# Altium PCB 7seg.PcbDoc
Units mil, origin at the board's own origin, x right, y up, seen from the top; angles counter-clockwise.
Board outline 2559.06 x 1160.43 mil, 2 copper layers (Top Layer, Bottom Layer); 19 components, 33 nets, 130 pads, 15 vias.
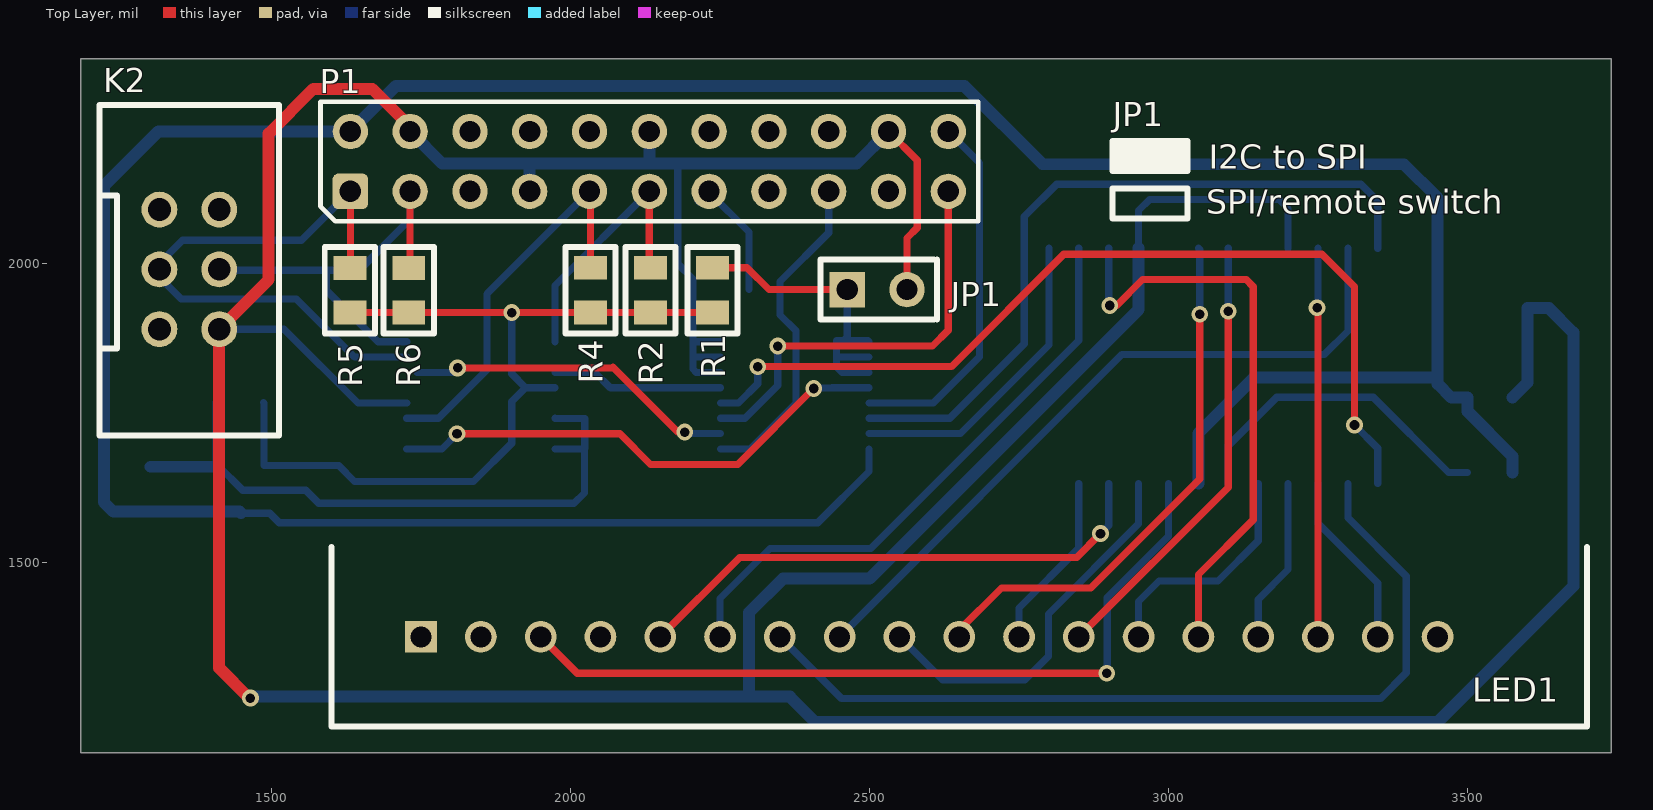
[diagram p0: Top Layer view]
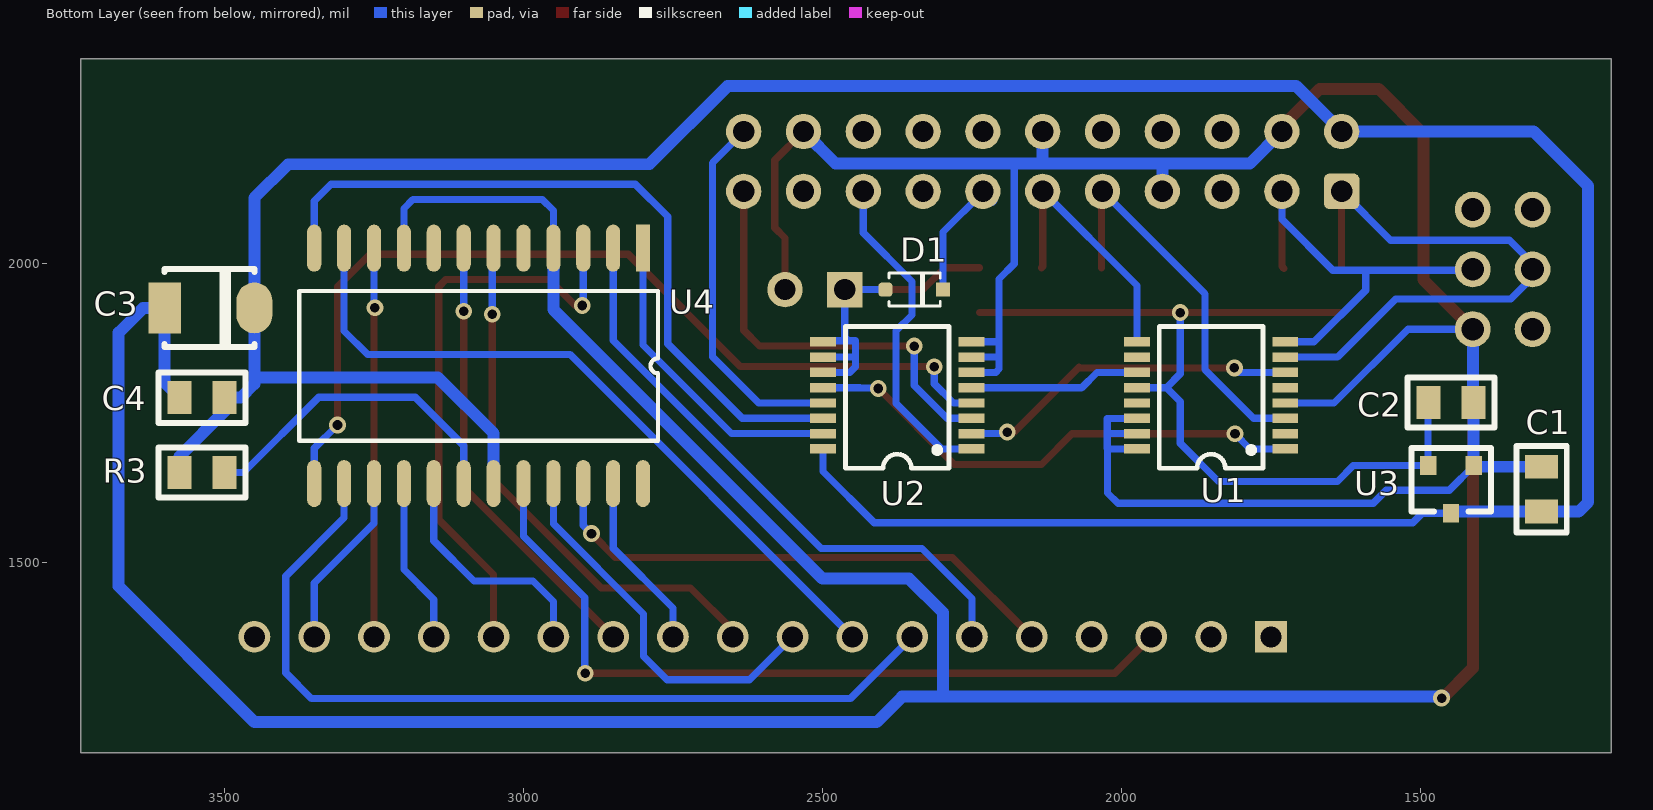
[diagram p1: Bottom Layer view, seen from below]

## Layer stack, top to bottom
Top Solder: solder mask 0.4, Solder Resist, Dk 3.5
Top Layer: signal copper 1.4
Dielectric 1: dielectric 12.6, FR-4, Dk 4.8
Bottom Layer: signal copper 1.4
Bottom Solder: solder mask 0.4, Solder Resist, Dk 3.5

## Board outline
1181.1,1181.1 3740.16,1181.1 3740.16,2341.54 1181.1,2341.54

## Design rules (kind name [scope] priority, off if disabled: settings)
Clearance [All] p1: gap=6
ComponentClearance [All] p1: gap=0 collisioncheckmode=3 verticalgap=0 showdistances=FALSE
HoleSize [All] p1: absolutevalues=TRUE maxlimit=130 minlimit=1 maxpercent=80.000 minpercent=20.000
MinimumSolderMaskSliver [All] p1: minsoldermaskwidth=1
PolygonConnect [All] p1: connectstyle=Relief reliefconductorwidth=10 reliefentries=4 polygonreliefangle="90 Angle" airgapwidth=10
RoutingVias [All] p1: holewidth=28 width=50 viastyle="Through Hole" minholewidth=28 minwidth=50 maxholewidth=28 maxwidth=50
SilkToSilkClearance [All] p1: silktosilkclearance=0
SilkToSolderMaskClearance [IsPad] p1: minsilkscreentomaskgap=0 clearancetoexposedcopper=TRUE
SolderMaskExpansion [All] p1: expansion=4
Width [All] p1: maxlimit=100 minlimit=10 preferedwidth=10
25 further rules are at their usual default settings.

## Components (designator, comment, footprint, x,y, rotation, side; value= is the part's Value field where it differs from the comment)
C1 "cap0805" SM0805 1297.24,1659.45 r270 bottom
C2 "cap0805" SM0805 1411.42,1766.73 r0 bottom
C3 "CAP_POL_SMB" "CAP_POL_SMB (3528)" 3460,1925 r0 bottom
C4 "cap0805" SM0805 3500,1775 r0 bottom
D1 "DiodeShottky_SOD323" SOD323 2389.76,1955.71 r180 bottom
JP1 "JUMPER2" JUMPER2 2462.6,1955.71 r90 top
K2 "IDC-06" IDC-06 1312.4,2089.57 r0 top
LED1 "NSA1166" NSA1166 1750,1375 r90 top
P1 "2x11,2.54mm vertical" "PLD-22 ,2x11 ,2.54 mm pitch" 2581.69,2170.08 r0 top (schematic designator P?)
R1 "res0805" SM0805 2237.2,1992.32 r270 top
R2 "res0805" SM0805 2133.86,1917.32 r90 top
R3 "res0805" SM0805 3575,1650 r180 bottom
R4 "res0805" SM0805 2033.46,1917.32 r90 top
R5 "res0805" SM0805 1630.91,1992.13 r270 top
R6 "res0805" SM0805 1729.33,1992.13 r270 top
U1 "SC18IS602BIPW" SSOP16_body_4.5mm 1850,1775 r90 bottom
U2 "74hc4053" SSOP16_body_4.5mm 2375,1775 r90 bottom
U3 "XC6206" SOT-23 1409.45,1661.42 r0 bottom
U4 "MAX7221" WSOIC_24_body_7.5mm 2800,2025 r270 bottom

## Footprints (in the part's own frame and the unit in brackets; to place one, negate y for a bottom-side part, rotate by r counter-clockwise, add the part's x,y. Pads: shape width x height; smd on the part's side, far side on the other; paste and mask are expansions set on the pad)
"CAP_POL_SMB (3528)" [mil]
  oval 60x85 smd: 1(-10,0)
  rect 55x85 smd: 2(140,0)
  silkscreen extent -10,-65 140,65
IDC-06 [mil]
  round 60 hole 38: 1(0,0) 2(100,0) 3(0,-100) 4(100,-100) 5(0,-200) 6(100,-200)
  silkscreen extent -100,-378 200,175
JUMPER2 [mm]
  rect 1.5x1.5 hole 0.9: 1(0,0)
  round 1.5 hole 0.9: 2(0,-2.54)
  silkscreen extent -1.27,-3.81 1.27,1.14
NSA1166 [mm] "7 seg LED"
  rect 1.35x1.35 hole 0.9: 1(0,0)
  round 1.35 hole 0.9: 2(0,-2.54) 3(0,-5.08) 4(0,-7.62) 5(0,-10.16) 6(0,-12.7) 7(0,-15.24) 7(0,-15.24) 8(0,-17.78) 9(0,-20.32) 10(0,-22.86) 11(0,-25.4) 12(0,-27.94) 13(0,-30.48) 14(0,-33.02) 15(0,-35.56) 16(0,-38.1) 17(0,-40.64) 18(0,-43.18)
  silkscreen extent -3.81,-49.53 3.81,3.81
"PLD-22 ,2x11 ,2.54 mm pitch" [mm]
  rrect30% 1.5x1.5 hole 0.9: 1(-24.13,-1.27)
  round 1.5 hole 0.9: 2(-24.13,1.27) 3(-21.59,-1.27) 4(-21.59,1.27) 5(-19.05,-1.27) 6(-19.05,1.27) 7(-16.51,-1.27) 8(-16.51,1.27) 9(-13.97,-1.27) 10(-13.97,1.27) 11(-11.43,-1.27) 12(-11.43,1.27) 13(-8.89,-1.27) 14(-8.89,1.27) 15(-6.35,-1.27) 16(-6.35,1.27) 17(-3.81,-1.27) 18(-3.81,1.27) 19(-1.27,-1.27) 20(-1.27,1.27) 21(1.27,-1.27) 22(1.27,1.27)
  silkscreen extent -25.4,-2.54 2.54,2.54, body extent -25.4,-2.54 2.54,2.54, height 8.54
SM0805 [mil]
  rect 40x55 smd: 1(0,0) 2(75,0)
  silkscreen extent -35,-42 110,42
SOD323 [mm] "SOD323"
  rrect50% 0.6x0.6 smd: 1(-0.125,0)
  rect 0.6x0.6 smd: 2(2.325,0)
  silkscreen extent 0.03,-0.7 2.2,0.7, body extent 0.25,-0.7 2.05,0.7, height 1.15
SOT-23 [mm]
  rect 0.7x0.8 smd: 1(0.025,0) 2(1.975,0) 3(1,2.025)
  silkscreen extent -0.7,-0.75 2.68,1.95
SSOP16_body_4.5mm [mm] "SSOP-16;Body Width 4.5mm; Pitch 0.65 mm"
  rect 0.4x1.1 smd: 1(-2.175,-3.15) 2(-1.525,-3.15) 3(-0.875,-3.15) 4(-0.225,-3.15) 5(0.425,-3.15) 6(1.075,-3.15) 7(1.725,-3.15) 8(2.375,-3.15) 9(2.375,3.15) 10(1.725,3.15) 11(1.075,3.15) 12(0.425,3.15) 13(-0.225,3.15) 14(-0.875,3.15) 15(-1.525,3.15) 16(-2.175,3.15)
  silkscreen extent -3,-2.2 3.02,2.2
WSOIC_24_body_7.5mm [mm]
  rect 2x0.6 smd: 1(0,0)
  oval 2x0.6 smd: 2(0,-1.27) 3(0,-2.54) 4(0,-3.81) 5(0,-5.08) 6(0,-6.35) 7(0,-7.62) 8(0,-8.89) 9(0,-10.16) 10(0,-11.43) 11(0,-12.7) 12(0,-13.97) 13(10,-13.97) 14(10,-12.7) 15(10,-11.43) 16(10,-10.16) 17(10,-8.89) 18(10,-7.62) 19(10,-6.35) 20(10,-5.08) 21(10,-3.81) 22(10,-2.54) 23(10,-1.27) 24(10,0)
  silkscreen extent 1.82,-14.61 8.19,0.63

## Part data
C1 C2 C4: "Capacitor"
C3: "CAP_POL_SMB(3528)"
D1: "SOD323"
LED1: "NSA retro 7 seg display"
P1: library part "2x11, 2.54mm, vertical", "Header, 22-Pin"
R1 R2 R3 R4 R5 R6: "Resistor"
U1: "i2c to SPI bridge"
U2: "3 independent SPDT CMOS switch"
U3: "SOT-23-3 ldo"
U4: library part MAX7221_WSOIC24, "7 seg 8 digits driver"

## Via types
v1: diameter 28, hole 16, Top Layer to Bottom Layer, 15 vias

## Nets (pads, with @x,y where several pads share a name; then routed paths per layer and width w, separated by ;. In a path a pad name is that pad's centre, name@x,y a point inside that pad or via, vN(x,y) a via of type N, cw(c..) or ccw(c..) an arc to the next point about the centre after c; other vN are vias at no path point)
+3.3V: C2.2 R1.2 R2.1 R4.1 R5.2 R6.2 U1.12 U3.2 | length 1447.9
  Top Layer w12: R5.2 1631.1,1917.32 R2.1 R1.2
  Bottom Layer w12: C2.2 1487.2,1765.94 U3.2 1612.2,1661.42 1638.78,1634.84 1837.6,1634.84 1901.57,1698.82 1901.57,1768.5 1924.8,1791.73 ; v1@1901.57,1914.37 1901.57,1814.96 1924.8,1791.73 ; U1.12 1924.8,1791.73
  other v1: 1901.57,1917.32
+5V: C1.2 C3.1 C4.1 P1.2 R3.1 U2.16 U3.3 U4.19 | length 5320
  Bottom Layer w12: U3.3 1497.05,1581.69 1512.8,1565.94 2413.39,1565.94 2499.02,1651.57 U2.16
  Bottom Layer w20: U3.3 1446.06,1584.45 C1.2 1235.43,1584.45 1219.49,1600.39 1219.49,2128.94 1310.63,2220.08 P1.2 1707.87,2296.26 2658.46,2296.26 2789.37,2165.35 3393.7,2165.35 3450,2109.06 C3.1 3450,1811.02 ; U4.19 3050,1715.35 3143.35,1808.71 3450,1808.71 3450,1798.03 3473.03,1775 C4.1 3500,1751.97 3575,1676.97 R3.1
CSE: P1.22 U2.13 | length 615.3
  Bottom Layer w12: U2.13 2606.69,1766.14 2684.06,1843.5 2684.06,2167.72 P1.22
CSI: U1.1 U2.12 | length 857.8
  Top Layer w12: v1(1810.04,1714.57) 2082.68,1714.57 2133.86,1663.39 2279.53,1663.39 v1(2406.5,1790.35)
  Bottom Layer w12: U1.1 1784.84,1689.37 v1(1810.04,1714.57) ; v1(2406.5,1790.35) 2407.48,1791.34 2437.01,1791.34 2437.4,1791.73 U2.12
CST: U2.14 U4.12 | length 1228
  Bottom Layer w12: U2.14 2634.25,1740.55 2758.86,1865.16 2758.86,2077.76 2812.99,2131.89 3321.85,2131.89 3350,2103.74 U4.12
GND: C1.1 C2.1 C3.2 C4.2 JP1.2 K2.6 P1.4 P1.7 P1.12 P1.20 U1.4 U1.14 U1.15 U1.16 U2.6 U2.7 U2.8 U3.1 U4.4 U4.9 | length 9192
  Top Layer w12: P1.20 2579.72,2172.05 2579.72,2059.06 2562.6,2041.93 JP1.2 JP1.2@2578.74,1971.85
  Top Layer w20: v1(1464.57,1272.64) 1462.6,1272.64 1412.4,1322.83 K2.6 1495.08,1972.24 1495.08,2216.54 1569.88,2291.34 1668.31,2291.34 1731.69,2227.95 P1.4
  Bottom Layer w12: U3.1 1451.77,1620.08 1557.09,1620.08 1578.74,1598.43 2005.91,1598.43 2023.23,1615.75 2023.23,1689.37 ; K2.6 1520.87,1889.57 1644.29,1766.14 U1.4 ; U1.16 2023.23,1689.37 ; U1.15 2023.62,1714.96 ; U1.14 1974.41,1740.16 2023.62,1740.16 2023.62,1714.96 ; 2179.13,2166.34 2179.13,1999.02 2204.72,1973.43 2204.72,1866.93 ; U2.6 2210.24,1817.32 2204.72,1822.83 2204.72,1844.88 ; U2.7 2206.69,1842.91 2204.72,1844.88 ; U2.8 2206.3,1868.5 2204.72,1866.93 ; U4.4 2950,2087.8 2968.5,2106.3 3185.04,2106.3 3200,2091.34 U4.9 ; 2023.23,1689.37 2023.62,1689.76 2023.62,1714.96 ; 2204.72,1844.88 2204.72,1866.93
  Bottom Layer w20: C1.1 1408.46,1659.45 U3.1 1411.42,1662.4 C2.1 1412.4,1767.72 K2.6 ; v1@1460.24,1275 2298.23,1275 ; P1.4 1785.43,2166.34 1936.02,2166.34 ; P1.7 1931.69,2162.01 1936.02,2166.34 ; P1.12 2131.69,2166.54 2131.89,2166.34 ; P1.20 2477.95,2166.34 2179.13,2166.34 2131.89,2166.34 ; U4.4 2950,1922.44 2500,1472.44 2355.32,1472.44 2298.23,1415.35 2298.23,1275 ; C4.2 3600,1800 C3.2 3636.02,1925 3677.17,1883.86 3677.17,1459.65 3449.8,1232.28 2409.45,1232.28 2366.73,1275 2298.23,1275 ; 1936.02,2166.34 2131.89,2166.34
INT: P1.11 R2.2 U1.9 | length 445.5
  Top Layer w12: P1.11 2131.69,1994.49 R2.2
  Bottom Layer w12: U1.9 1974.02,1962.4 P1.11
ISET: R3.2 U4.18 | length 548.8
  Bottom Layer w12: U4.18 3100,1694.49 3181.1,1775.59 3342.52,1775.59 3468.11,1650 R3.2
MOSIE: P1.17 U2.1 | length 556.6
  Bottom Layer w12: U2.1 2300.59,1689.37 2376.97,1765.75 2376.97,1886.81 2350.39,1913.39 2350.39,1969.49 2431.69,2050.79 P1.17
MOSII: U1.6 U2.2 | length 549.3
  Top Layer w12: v1(1811.02,1824.8) 2069.88,1824.8 2070.87,1825.79 2179.13,1717.52 v1(2190.94,1717.52)
  Bottom Layer w12: U1.6@1743.15,1817.25 v1@1806.14,1817.25 ; v1(2190.94,1717.52) 2193.5,1714.96 U2.2
MOSIT: U2.15 U4.1 | length 524.3
  Bottom Layer w12: U2.15 2651.97,1714.96 2800,1862.99 U4.1
NetLED1_3: LED1.3 U4.20 | length 1331.7
  Top Layer w12: LED1.3 2011.02,1313.98 v1(2896.65,1313.98)
  Bottom Layer w12: v1@2897.64,1313.98 2897.64,1440.94 3000,1543.31 U4.20
NetLED1_5: LED1.5 U4.22 | length 896.5
  Top Layer w12: LED1.5 2282.87,1507.87 2846.46,1507.87 v1@2885.83,1547.24
  Bottom Layer w12: v1(2886.22,1547.64) 2900,1561.42 U4.22
NetLED1_6: LED1.6 U4.2 | length 997.1
  Bottom Layer w12: LED1.6 2250,1438.98 2333.66,1522.64 2501.97,1522.64 2850,1870.67 U4.2
NetLED1_7: LED1.7 U4.14 | length 1465.2
  Bottom Layer w12: LED1.7@2350,1375 2453.35,1271.65 3354.33,1271.65 3397.64,1314.96 3397.64,1476.38 3300,1574.02 U4.14
NetLED1_8: LED1.8 U4.11 | length 1200.3
  Bottom Layer w12: LED1.8 2922.44,1847.44 3260.83,1847.44 3300,1886.61 U4.11
NetLED1_9: LED1.9 U4.21 | length 646.5
  Bottom Layer w12: LED1.9 2621.85,1303.15 2759.84,1303.15 2799.21,1342.52 2799.21,1413.39 2950,1564.17 U4.21
NetLED1_10: LED1.10 U4.6 | length 905.1
  Top Layer w12: LED1.10 2650,1386.22 2720.47,1456.69 2870.08,1456.69 3052.17,1638.78 v1(3052.17,1914.37)
  Bottom Layer w12: U4.6 3052.17,2022.83 v1(3052.17,1914.37)
NetLED1_11: LED1.11 U4.23 | length 297.7
  Bottom Layer w12: LED1.11 2750,1423.23 2850,1523.23 U4.23
NetLED1_12: LED1.12 U4.7 | length 753.6
  Top Layer w12: LED1.12 3100,1625 v1(3100,1919.68)
  Bottom Layer w12: v1(3100,1919.68) U4.7
NetLED1_13: LED1.13 U4.17 | length 396.8
  Bottom Layer w12: LED1.13 2950,1434.25 2984.25,1468.5 3082.68,1468.5 3150,1535.83 U4.17
NetLED1_14: LED1.14 U4.3 | length 983.1
  Top Layer w12: v1(2901.57,1929.13) 2913.39,1929.13 2956.69,1972.44 3129.92,1972.44 3141.73,1960.63 3141.73,1570.87 3050,1479.13 LED1.14
  Bottom Layer w12: U4.3 2900,1930.71 v1(2901.57,1929.13)
NetLED1_15: LED1.15 U4.16 | length 277
  Bottom Layer w12: LED1.15 3150,1437.4 3200,1487.4 U4.16
NetLED1_16: LED1.16 U4.10 | length 647.9
  Top Layer w12: v1(3248.42,1925.59) 3250,1924.02 LED1.16
  Bottom Layer w12: v1@3248.03,1929.13 3250,1931.1 U4.10
NetLED1_17: LED1.17 U4.15 | length 297.7
  Bottom Layer w12: U4.15 3250,1564.96 3350,1464.96 LED1.17
REM: D1.2 P1.13 | length 212
  Bottom Layer w12: P1.13 2231.69,2118.7 2298.23,2052.17 D1.2
  Bottom Layer w20: P1.13@2217.52,2105.91 P1.13
RST: P1.9 R4.2 U1.3 | length 665.7
  Top Layer w12: P1.9 2033.46,2118.31 R4.2
  Bottom Layer w12: U1.3 1778.95,1740.57 1860.24,1821.85 1860.24,1948.62 P1.9
SCKE: P1.21 U2.3 | length 712.7
  Top Layer w12: v1(2346.46,1861.22) 2605.32,1861.22 2631.69,1887.6 P1.21
  Bottom Layer w12: U2.3 2291.73,1740.55 2346.46,1795.28 v1(2346.46,1861.22)
SCKI: U1.11 U2.5 | length 287.6
  Bottom Layer w12: U1.11 2040.94,1817.32 2066.54,1791.73 U2.5
SCKT: U2.4 U4.13 | length 1547.6
  Top Layer w12: v1(2313.11,1826.86) 2636.9,1826.86 2824.8,2014.76 3256.89,2014.76 3311.02,1960.63 v1(3311.02,1729.33)
  Bottom Layer w12: U2.4 2280.91,1766.14 2313.11,1798.34 v1(2313.11,1826.86) ; v1(3311.02,1729.33) 3350,1690.35 U4.13
SCL: K2.4 P1.3 R6.1 U1.8 | length 747.1
  Top Layer w12: R6.1@1728.35,1991.14 R6.1 1731.69,1994.49 P1.3
  Bottom Layer w12: K2.4@1400.59,1988.19 1591.54,1988.19 ; U1.8 1677.76,1868.5 1591.54,1954.72 1591.54,1988.19 ; P1.3 1731.69,2073.23 1646.65,1988.19 1591.54,1988.19
SDA: K2.3 P1.1 R5.1 U1.7 | length 999.6
  Top Layer w12: R5.1 1631.69,1992.91 P1.1
  Bottom Layer w12: P1.1 1550,2038.39 1350.79,2038.39 1300.59,1988.19 1348.82,1939.96 1541.34,1939.96 1638.39,1842.91 U1.7
SW: D1.1 JP1.1 R1.1 U2.9 U2.10 U2.11 | length 607
  Top Layer w12: R1.1 2295.08,1992.32 2331.69,1955.71 JP1.1
  Bottom Layer w12: D1.1 JP1.1 2462.6,1875.98 2456.69,1870.08 ; U2.11 2454.33,1817.32 2444.88,1826.77 2444.88,1842.52 ; U2.10 2445.28,1842.91 2444.88,1842.52 ; U2.9 2497.44,1870.08 2456.69,1870.08 ; 2444.88,1842.52 2444.88,1870.08 2456.69,1870.08
pads on no net: K2.1 K2.2 K2.5 LED1.1 LED1.2 LED1.4 LED1.18 P1.5 P1.6 P1.8 P1.10 P1.14 P1.15 P1.16 P1.18 P1.19 U1.2 U1.5 U1.10 U1.13 U4.5 U4.8 U4.24

## Silkscreen, mask and mechanical layers (free items; w line width, h text height)
Top Overlay:
  lines w10: 2906.5,2161.42 3027.56,2161.42 ; 2906.5,2165.75 3027.56,2165.75 ; 2906.5,2173.23 3027.56,2173.23 ; 2906.5,2181.1 3027.56,2181.1 ; 2906.5,2196.85 3031.5,2196.85 ; 2909.45,2188.98 3031.5,2188.98 ; 2906.5,2075 3031.5,2075 3031.5,2125 2931.5,2125 2906.5,2125 2906.5,2075 ; 2906.5,2153.94 2906.5,2203.94 2931.5,2203.94 3031.5,2203.94 3031.5,2153.94 2906.5,2153.94
  text "JP1" at 2906.5,2228.94 h40
  text "I2C to SPI" at 3066.93,2157.48 h40
  text "SPI/remote switch" at 3062.99,2082.68 h40
Mechanical 1:
  lines w10: 1181.1,1181.1 3739.53,1181.1 ; 1181.1,2343.5 3734.61,2343.5 ; 3739.53,1180.67 3739.53,2343.5